# EAGLE board dianlutu (EAGLE 8.7.0)

Size 160 x 100 mm. Coordinates in mm from the lower left corner, seen from the top.
Outline: 0,0 160,0 160,100 0,100 0,0
Copper layers (1*16): Top 0.035mm / dielectric 1.5mm / Bottom 0.035mm
Design rules "default": minimum track width 6mil, minimum drill 0.35mm, track to track 6mil, track to pad 6mil, pad to pad 6mil, via to via 6mil, smd to smd 6mil, copper to edge 40mil, drill to drill 6mil, minimum pad ring 10mil, minimum via ring 8mil, stop-mask expansion 4mil, vias tented up to drill 0mil, thermal gap 10mil

## Footprints (pad centres in the part's own frame; a part is rotated, then mirrored left to right if it is on the bottom)
C0805 = smd 1.3 x 1.5: 1 -0.95,0; 2 0.95,0
SOD323_ST = smd 0.8 x 0.6: A 1.25,0; C -1.25,0
R0805 = smd 1.3 x 1.5: 1 -0.95,0; 2 0.95,0
S63S = drill 0.813 long: A 2.54,1.27; E -2.54,1.27; S 0,1.27
M0805 = smd 1.3 x 1.6: 1 -0.95,0; 2 0.95,0
DTS-6 = drill 1 long: 1 -3.25,2.25; 2 3.25,2.25; 3 -3.25,-2.25; 4 3.25,-2.25
KSS1201 = drill 0.914 pad 2.159 octagon: + 3.251,0; - -3.251,0
LQFP64 = smd 1.2 x 0.3: 1 -5.75,3.75; 2 -5.75,3.25; 3 -5.75,2.75; 4 -5.75,2.25; 5 -5.75,1.75; 6 -5.75,1.25; 7 -5.75,0.75; 8 -5.75,0.25; 9 -5.75,-0.25; 10 -5.75,-0.75; 11 -5.75,-1.25; 12 -5.75,-1.75; 13 -5.75,-2.25; 14 -5.75,-2.75; 15 -5.75,-3.25; 16 -5.75,-3.75; 33 5.75,-3.75; 34 5.75,-3.25; 35 5.75,-2.75; 36 5.75,-2.25; 37 5.75,-1.75; 38 5.75,-1.25; 39 5.75,-0.75; 40 5.75,-0.25; 41 5.75,0.25; 42 5.75,0.75; 43 5.75,1.25; 44 5.75,1.75; 45 5.75,2.25; 46 5.75,2.75; 47 5.75,3.25; 48 5.75,3.75 | smd 0.3 x 1.2: 17 -3.75,-5.75; 18 -3.25,-5.75; 19 -2.75,-5.75; 20 -2.25,-5.75; 21 -1.75,-5.75; 22 -1.25,-5.75; 23 -0.75,-5.75; 24 -0.25,-5.75; 25 0.25,-5.75; 26 0.75,-5.75; 27 1.25,-5.75; 28 1.75,-5.75; 29 2.25,-5.75; 30 2.75,-5.75; 31 3.25,-5.75; 32 3.75,-5.75; 49 3.75,5.75; 50 3.25,5.75; 51 2.75,5.75; 52 2.25,5.75; 53 1.75,5.75; 54 1.25,5.75; 55 0.75,5.75; 56 0.25,5.75; 57 -0.25,5.75; 58 -0.75,5.75; 59 -1.25,5.75; 60 -1.75,5.75; 61 -2.25,5.75; 62 -2.75,5.75; 63 -3.25,5.75; 64 -3.75,5.75
DIP794W45P254L1016H508Q8 = drill 0.74 pad 1.14 square: 1 -3.97,3.81 | drill 0.74 pad 1.14: 2 -3.97,1.27; 3 -3.97,-1.27; 4 -3.97,-3.81; 5 3.97,-3.81; 6 3.97,-1.27; 7 3.97,1.27; 8 3.97,3.81
32005-201 = smd 3.1 x 0.5: 1 3,1.6; 2 3,0.8; 3 3,0; 4 3,-0.8; 5 3,-1.6 | smd 2.5 x 2: M1 -3,-4.45; M2 -3,4.45 | smd 3.3 x 2: M3 2.9,4.45; M4 2.9,-4.45 | hole 0.9: 0,2.2; 0,-2.2

## Placement (x,y rotation side)
C1  0.1uf  [C0805]  -76.2,-45.72 0 top  (outside the outline)
C2  1000uF  [C0805]  -40.64,74.93 0 top  (outside the outline)
D1  BAT60J  [SOD323_ST]  -76.2,64.77 0 top  (outside the outline)
R1  10R  [R0805]  -76.2,-39.37 0 top  (outside the outline)
R4  1K5  [R0805]  -30.48,74.93 0 top  (outside the outline)
R5  [S63S]  -68.58,-11.43 0 top  (outside the outline)
R6  100K  [M0805]  -45.72,74.93 0 top  (outside the outline)
S1  DTS-6  [DTS-6]  -19.05,21.59 0 top  (outside the outline)
S2  DTS-6  [DTS-6]  -30.48,21.59 0 top  (outside the outline)
S3  DTS-6  [DTS-6]  -41.91,21.59 0 top  (outside the outline)
S4  DTS-6  [DTS-6]  -53.34,21.59 0 top  (outside the outline)
S5  DTS-6  [DTS-6]  -64.77,21.59 0 top  (outside the outline)
S6  DTS-6  [DTS-6]  -19.05,33.02 0 top  (outside the outline)
S7  DTS-6  [DTS-6]  -30.48,33.02 0 top  (outside the outline)
S8  DTS-6  [DTS-6]  -41.91,33.02 0 top  (outside the outline)
S9  DTS-6  [DTS-6]  -53.34,33.02 0 top  (outside the outline)
S10  DTS-6  [DTS-6]  -64.77,33.02 0 top  (outside the outline)
S11  DTS-6  [DTS-6]  -19.05,44.45 0 top  (outside the outline)
S12  DTS-6  [DTS-6]  -30.48,44.45 0 top  (outside the outline)
S13  DTS-6  [DTS-6]  -41.91,44.45 0 top  (outside the outline)
S14  DTS-6  [DTS-6]  -53.34,44.45 0 top  (outside the outline)
S15  DTS-6  [DTS-6]  -64.77,44.45 0 top  (outside the outline)
S16  DTS-6  [DTS-6]  -19.05,55.88 0 top  (outside the outline)
S17  DTS-6  [DTS-6]  -30.48,55.88 0 top  (outside the outline)
S18  DTS-6  [DTS-6]  -41.91,55.88 0 top  (outside the outline)
S19  DTS-6  [DTS-6]  -53.34,55.88 0 top  (outside the outline)
S20  DTS-6  [DTS-6]  -64.77,55.88 0 top  (outside the outline)
S21  DTS-6  [DTS-6]  -19.05,67.31 0 top  (outside the outline)
S22  DTS-6  [DTS-6]  -30.48,67.31 0 top  (outside the outline)
S23  DTS-6  [DTS-6]  -41.91,67.31 0 top  (outside the outline)
S24  DTS-6  [DTS-6]  -53.34,67.31 0 top  (outside the outline)
S25  DTS-6  [DTS-6]  -64.77,67.31 0 top  (outside the outline)
SP1  KSS1201  [KSS1201]  -63.5,-59.69 0 top  (outside the outline)
U1  STM32-C-64  [LQFP64]  -64.77,7.62 0 top  (outside the outline)
U2  LM386N-4/NOPB  [DIP794W45P254L1016H508Q8]  -52.07,7.62 0 top  (outside the outline)
X1  MINI-USB-SCHIELD-32005-201  [32005-201]  -35.56,7.62 0 top  (outside the outline)

## Library data of the parts
C1 C2 = rcl; SPICEPREFIX: C
D1 = diode
R1 = rcl; SPICEPREFIX: R
R4 R6 = resistor
R5 = pot
S1-S25 = switch-tact
SP1 = buzzer; OC_FARNELL: unknown; OC_NEWARK: unknown
U1 = pel_stm32
U2 = LM386N-4_NOPB; AVAILABILITY: Unavailable; DESCRIPTION: Linear IC - Audio amplifier Texas Instruments LM386N-4/NOPB 1-channel _mono_ Class AB PDIP 8; MF: Texas Instruments; MP: LM386N-4/NOPB; PACKAGE: DIP-8 Texas Instruments; PRICE: None
X1 = con-cypressindustries; OC_FARNELL: unknown; OC_NEWARK: unknown

## Nets
0: R1.1 R5.A R6.1 SP1.- U1.12 U1.18 U1.31 U1.47 U1.63 U2.2 U2.4 X1.5 X1.M1
3V: R4.1 U1.1 U1.19 U1.32 U1.48 U1.64
5V: D1.A U2.6
COL1: S1.4 S6.4 S11.4 S16.4 S21.4 U1.26
COL2: S2.4 S7.4 S12.4 S17.4 S22.4 U1.27
COL3: S3.4 S8.4 S13.4 S18.4 S23.4 U1.28
COL4: S4.4 S9.4 S14.4 S19.4 S24.4 U1.55
COL5: S5.4 S10.4 S15.4 S20.4 S25.4 U1.56
N$1: D1.C X1.1
N$2: U1.45
N$3: C2.2 SP1.+
N$4: R6.2 X1.4
N$7: U1.60
N$9: C1.2 R1.2
N$12: R5.S U2.3
N$18: C1.1 C2.1 U2.5
PA4: R5.E U1.20
ROW1: S1.2 S2.2 S3.2 S4.2 S5.2 U1.57
ROW2: S6.2 S7.2 S8.2 S9.2 S10.2 U1.58
ROW3: S11.2 S12.2 S13.2 S14.2 S15.2 U1.59
ROW4: S16.2 S17.2 S18.2 S19.2 S20.2 U1.61
ROW5: S21.2 S22.2 S23.2 S24.2 S25.2 U1.62
USB_DP: R4.2 X1.3
VDDA: U1.13

## Tracks (layer width: path | path; a pad name or v marks a point on that pad's centre or on a via)
0  (12 unrouted)
3V  (5 unrouted)
5V  (1 unrouted)
COL1  (5 unrouted)
COL2  (5 unrouted)
COL3  (5 unrouted)
COL4  (5 unrouted)
COL5  (5 unrouted)
N$1  (1 unrouted)
N$3  (1 unrouted)
N$4  (1 unrouted)
N$9  (1 unrouted)
N$12  (1 unrouted)
N$18  (2 unrouted)
PA4  (1 unrouted)
ROW1  (5 unrouted)
ROW2  (5 unrouted)
ROW3  (5 unrouted)
ROW4  (5 unrouted)
ROW5  (5 unrouted)
USB_DP  (1 unrouted)